# Altium PCB HV_PCB.PcbDoc
Units mil, origin at the board's own origin, x right, y up, seen from the top; angles counter-clockwise.
Board outline 3000 x 3000 mil, 2 copper layers (Top Layer, Bottom Layer); 18 components, 10 nets, 51 pads, 16 vias.
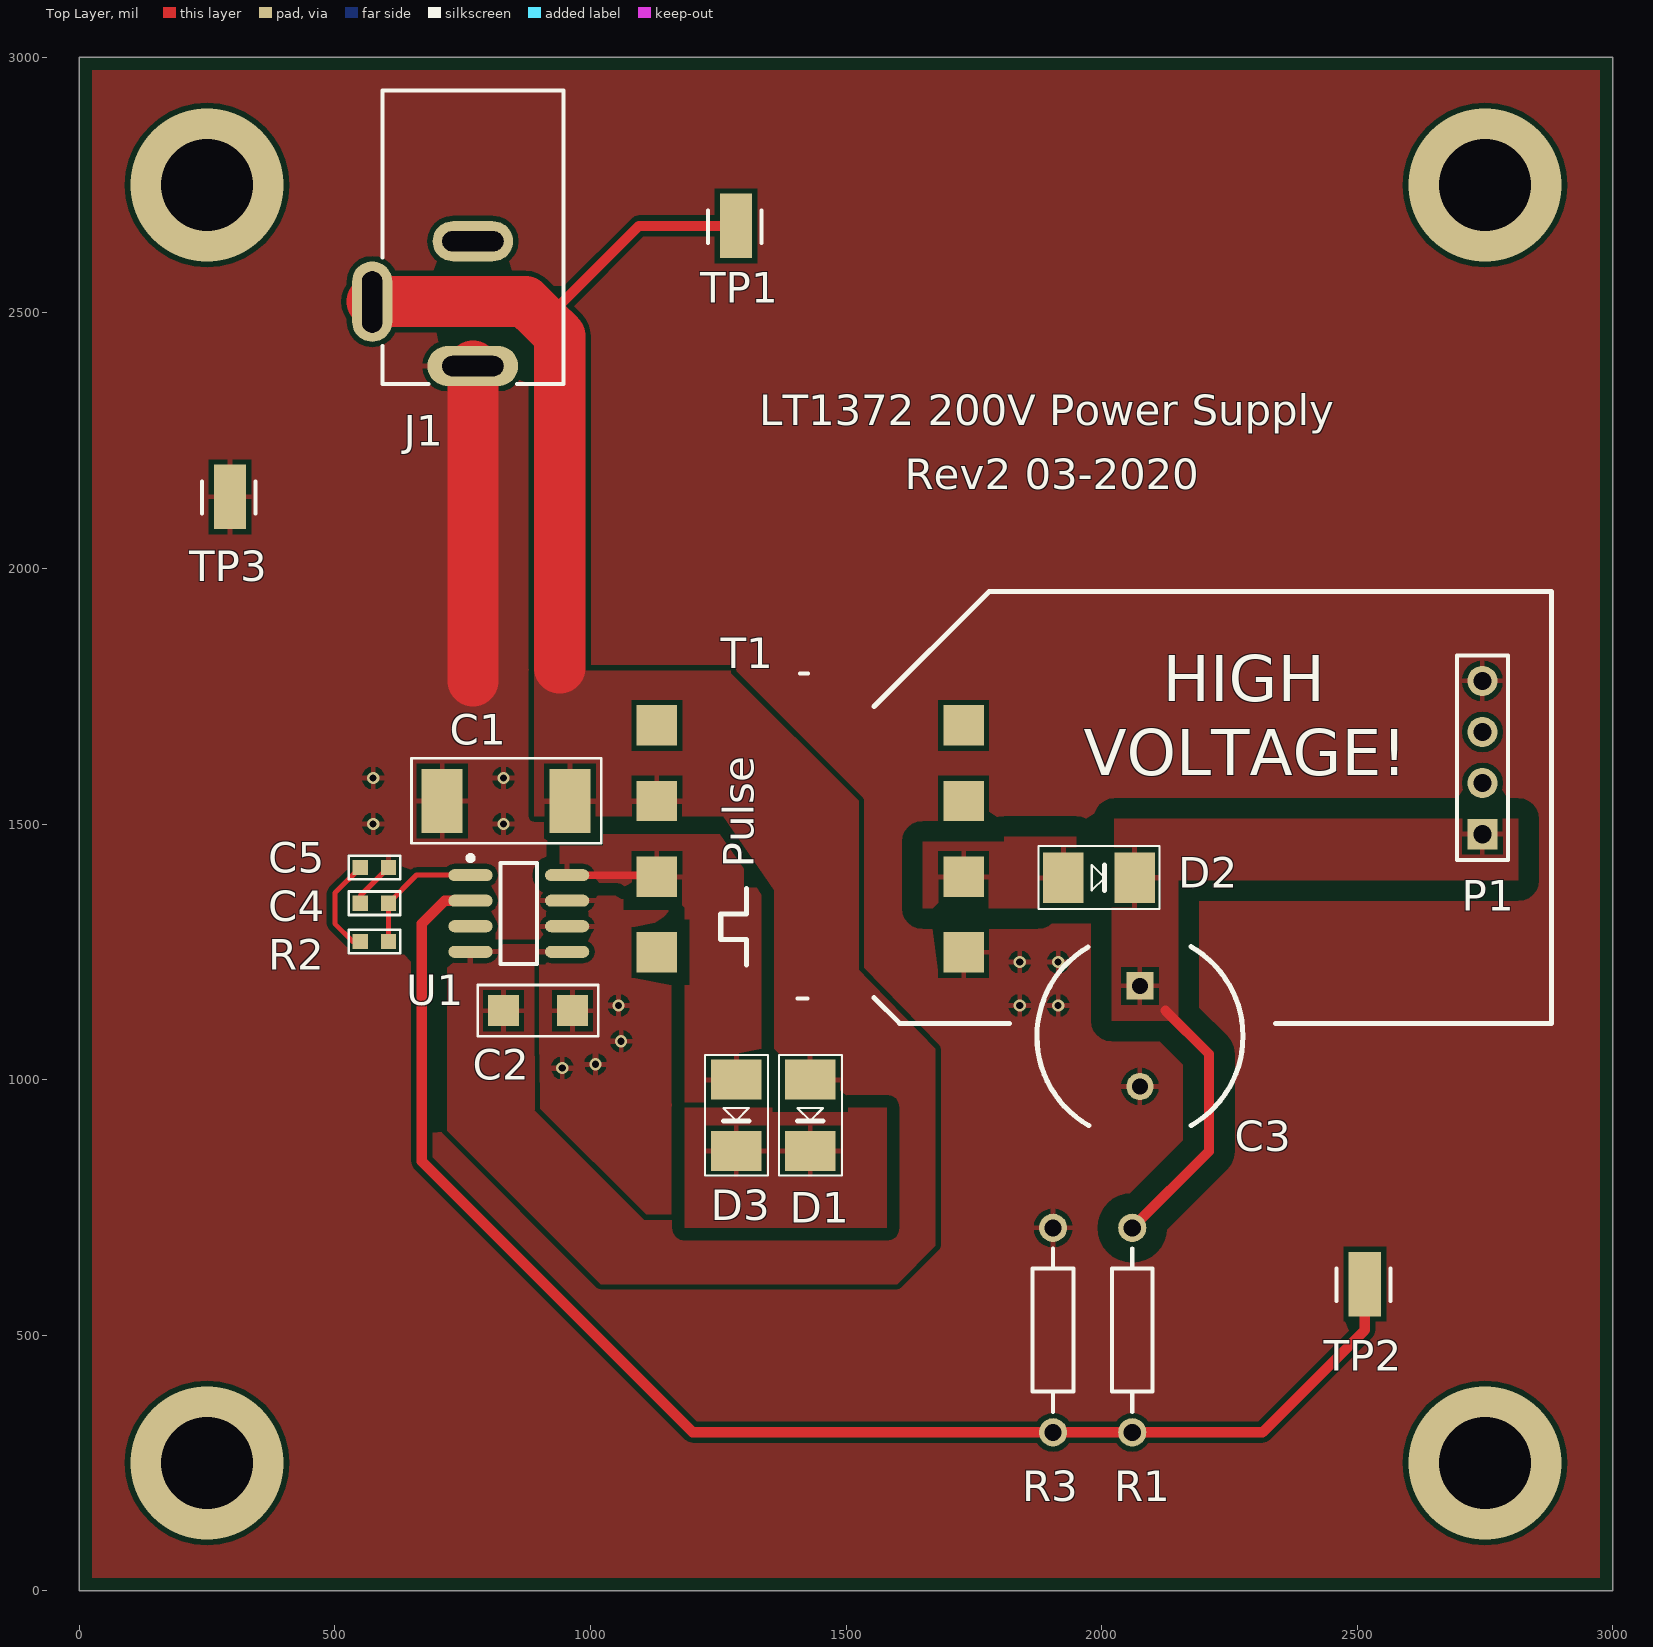
[diagram p0: Top Layer view]
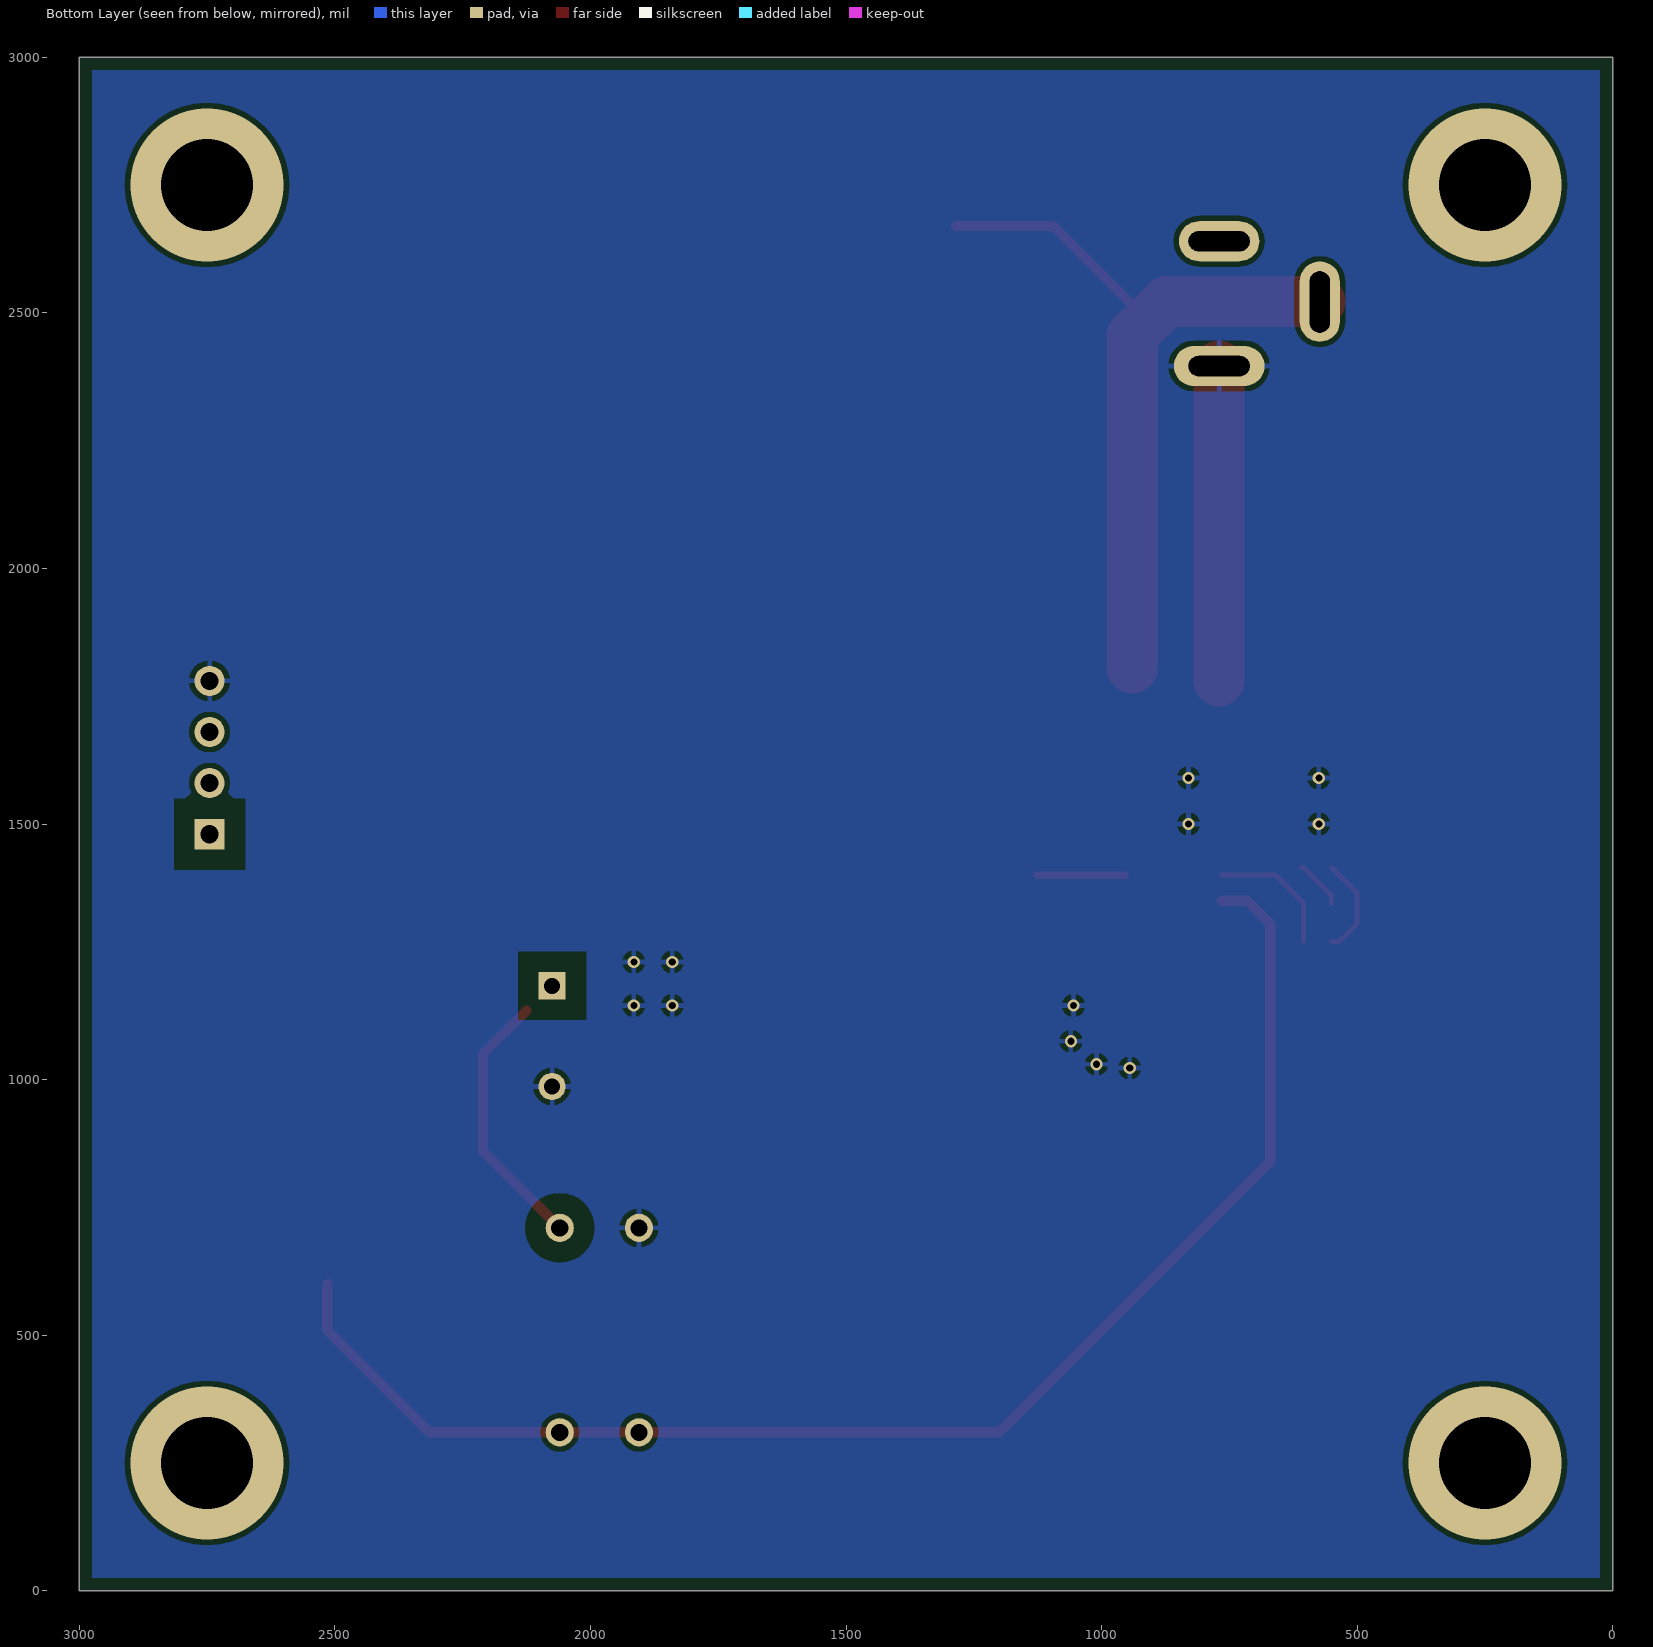
[diagram p1: Bottom Layer view, seen from below]

## Layer stack, top to bottom
Top Layer: signal copper 1.4
Dielectric: core 12.6, FR-4, Dk 4.8
Bottom Layer: signal copper 1.4

## Board outline
0,0 3000,0 3000,3000 0,3000 0,0

## Design rules (kind name [scope] priority, off if disabled: settings)
Clearance Clearance_HV [InNetClass('HV') vs Not InNetClass('HV')] p1: gap=40
Clearance Clearance_SW [InNetClass('SW') vs Not InNetClass('SW')] p2: gap=25
Clearance [All] p3: gap=10
HoleSize [All] p1: absolutevalues=TRUE maxlimit=300 minlimit=1 maxpercent=80.000 minpercent=20.000
MinimumSolderMaskSliver [All] p1: minsoldermaskwidth=7
PlaneClearance PlaneClearance_HV [InNetClass('HV')] p2: clearance=40
PlaneClearance PlaneClearance_SW [InNetClass('SW')] p3: clearance=25
PlaneConnect PlaneConnect_SW [InNetClass('SW')] p2: planeconnectstyle=Relief reliefexpansion=20 reliefentries=4 reliefconductorwidth=10 reliefairgap=25
PlaneConnect PlaneConnect_HV [InNetClass('SW')] p3: planeconnectstyle=Relief reliefexpansion=20 reliefentries=4 reliefconductorwidth=10 reliefairgap=40
PolygonConnect [All] p1: connectstyle=Relief reliefconductorwidth=10 reliefentries=4 polygonreliefangle="90 Angle"
RoomDefinition Main [InComponentClass('Main')] p1: confinementstyle=ConfineIn formatcopy=TRUE lockcomponents=FALSE outline 215,20 2865,20 2865,2975 215,2975
RoutingVias [All] p1: holewidth=28 width=50 viastyle="Through Hole" minholewidth=28 minwidth=50 maxholewidth=28 maxwidth=50
SilkscreenOverComponentPads [All] p1: minsilkscreentomaskgap=5
SolderMaskExpansion [All] p1: expansion=4
Width [All] p1: maxlimit=200 minlimit=6 preferedwidth=10 minimp=50.000000 maximp=50.000000 favimp=50.000000
25 further rules are at their usual default settings.

## Classes and differential pairs
net class SW: NetD1_K NetD3_A
net class HV: NetC3_1 NetD2_A

## Components (designator, comment, footprint, x,y, rotation, side; value= is the part's Value field where it differs from the comment)
C1 "C2512" 2512R-GENERIC 835,1545 r180 top
C2 "C1206" 1206C-GENERIC 830,1135 r0 top
C3 "4.7uF" CAP_10MM 2075,1085 r270 top
C4 "C0603" 0603C-TBD 605,1345 r180 top
C5 "C0603" 0603C-TBD 550,1415 r0 top
D1 "SML4757-E3/61" DO214AA 1430,1034.45 r90 top
D2 "UA1MTR" DO214AA 1890.79,1395 r180 top
D3 "SD560BTR" DO214AA 1285,1034.45 r90 top
J1 "PWR2.5" KLD-0202 770,2935.28 r270 top
P1 "Header 4" HDR1X4 2745,1480 r90 top
R1 "AXIAL-0.4" AXIAL-0.4 2060,510 r270 top
R2 "R0603" 0603R-TBD 605,1270 r180 top
R3 "AXIAL-0.4" AXIAL-0.4 1905,510 r90 top
T1 "PA396X_TRANS" TRANS18X15.6 1730,1249 r180 top
TP1 "Testpoint" 1206_Testpoint 1325,2595 r90 top
TP2 "Testpoint" 1206_Testpoint 2555,525 r90 top
TP3 "Testpoint" 1206_Testpoint 335,2065 r90 top
U1 "LT1372CS8" LT-S8-8_N 860,1325 r0 top

## Footprints (in the part's own frame and the unit in brackets; to place one, negate y for a bottom-side part, rotate by r counter-clockwise, add the part's x,y. Pads: shape width x height; smd on the part's side, far side on the other; paste and mask are expansions set on the pad)
0603C-TBD [mil] "CAPACITOR 0603 TBD"
  rect 30x30 smd: 1(0,0) 2(55,0)
  silkscreen extent -23,-23 78,23, body extent -4,-15 59,15, height 19
0603R-TBD [mil] "RESISTOR 0603 VALUE TO BE DETERMINED"
  rect 30x30 smd: 1(0,0) 2(55,0)
  silkscreen extent -23,-23 78,23, body extent -4,-15 59,15, height 20
1206_Testpoint [mil]
  rect 126x63 smd: 1(75,40)
  silkscreen extent 42,-10 105,95
1206C-GENERIC [mil]
  rect 60x60 smd: 1(0,0) 2(135,0)
  silkscreen extent -50,-50 185,50, body extent -8,-29 147,29, height 46
2512R-GENERIC [mil]
  rect 80x125 smd: 1(-125,0) 2(125,0)
  silkscreen extent -186,-84 185,83, body extent -139,-61 136,61, height 19
AXIAL-0.4 [mm] "Axial Device, Thru-Hole; 2 Leads; 0.4 in Pin Spacing"
  round 1.4 hole 0.85: 1(-5.08,0) 2(5.08,0)
  silkscreen extent -4.06,-1.02 4.06,1.02
CAP_10MM [mm]
  rect 1.35x1.35 hole 0.8: 1(-2.5,0)
  round 1.35 hole 0.8: 2(2.5,0)
  silkscreen extent -4.44,-5.12 4.44,5.12
DO214AA [mm]
  rect 2x2.5 smd: A(-0.875,0) K(-4.425,0)
  silkscreen extent -5.65,-1.58 0.35,1.55, body extent -5.2,-1.3 0,1.3, height 2.4
HDR1X4 [mm] "Connector; Header; 4 Position"
  rect 1.5x1.5 hole 0.9: 1(0,0)
  round 1.5 hole 0.9: 2(2.54,0) 3(5.08,0) 4(7.62,0)
  silkscreen extent -1.27,-1.27 8.89,1.27
KLD-0202 [mm] "DC Power Jack, 2.5mm, KLD Series, PCB Mount"
  oval 2x4.5 all layers, no hole: 1(13.7,0)
  round 1.5 hole 1 slot 3.048 at 90 deg: 1A(13.7,0) 2A(7.5,0)
  oval 2x4 all layers, no hole: 2(7.5,0)
  oval 4x2 all layers, no hole: 3(10.5,-5)
  round 1.5 hole 1 slot 3.048 at 0 deg: 3A(10.516,-5)
  silkscreen extent 0,-4.5 14.6,4.5
LT-S8-8_N [mm] "SOIC, 8-Leads, Body 5x4mm, Pitch 1.27mm, IPC Medium Density"
  oval 2.2x0.6 smd: 1(-2.4,1.905) 2(-2.4,0.635) 3(-2.4,-0.635) 4(-2.4,-1.905) 5(2.4,-1.905) 6(2.4,-0.635) 7(2.4,0.635) 8(2.4,1.905)
  silkscreen extent -2.52,-2.5 0.9,2.88, body extent -2,-2.5 2,2.5, height 1.76
TRANS18X15.6 [mil]
  rect 79x79 smd: 1(0,0) 2(0,-148) 3(0,-296) 4(0,-444) 5(600,-444) 6(600,-296) 7(600,-148) 8(600,0)
  silkscreen extent 304,-545 475,90, body extent 55,-535 545,80, height 39

## Part data
C1: library part 0805C-TBD
C2: library part 0805C-TBD, "CAPACITOR 0805 CERAMIC VALUE TO BE DETERMINED"
C3: library part Cap2, "Capacitor"
C4 C5: library part 0603C-TBD, "CAPACITOR 0603 CERAMIC VALUE TO BE DETERMINED"
D1: library part DIODE-ZENER-GENERIC, "GENERIC ZENER DIODE"
D2 D3: library part DIODE-GENERIC, "GENERIC DIODE"
J1: "Low Voltage Power Supply Connector"
P1: "Header, 4-Pin"
R1 R3: library part Res3, "Resistor"
R2: library part 0603R-TBD, "RESISTOR 0603 VALUE TO BE DETERMINED"
U1: "500 kHz High Efficiency 1.5 A Switching Regulator, 8-pin SOIC (S8-8), 0 to 125 degC"

## Via types
v1: diameter 24, hole 14, Top Layer to Bottom Layer, 12 vias
v2: diameter 300, hole 180, Top Layer to Bottom Layer, 4 vias

## Nets (pads, with @x,y where several pads share a name; then routed paths per layer and width w, separated by ;. In a path a pad name is that pad's centre, name@x,y a point inside that pad or via, vN(x,y) a via of type N, cw(c..) or ccw(c..) an arc to the next point about the centre after c; other vN are vias at no path point)
GND: C1.2 C2.2 C3.2 C4.2 C5.2 J1.1 J1.1A P1.4 R3.2 T1.1 TP3.1 U1.6 U1.7 | length 713.7
  Top Layer w10: C4.2 550,1360 C5.2 C5.2@610,1415
  Top Layer w100: 770,1780 J1.1
  other v1: 945,1022.64 1010,1030 1060,1075 1055,1145 1840,1145 1915,1145 1840,1230 1915,1230 575,1500 830,1500 575,1590 830,1590
NetC1_1: C1.1 C2.1 D1.A J1.3 J1.3A T1.6 TP1.1 U1.4 U1.5 | length 1496.2
  Top Layer w20: 910,2485 1095,2670 TP1.1
  Top Layer w100: J1.3 873.11,2521.89 910,2485 940,2455 940,1805
NetC3_1: C3.1 D2.K P1.1 R1.1 | length 523.9
  Top Layer w20: R1.1 2210,860 2210,1050 2125,1135 ; C3.1 C3.1@2076.57,1183.43
NetC4_1: C4.1 R2.1 U1.1 | length 258.3
  Top Layer w10: R2.1 C4.1 660,1400 U1.1
NetC5_1: C5.1 R2.2 | length 195.2
  Top Layer w10: R2.2 535,1270 500,1305 500,1365 C5.1
NetD1_K: D1.K D3.K
NetD2_A: D2.A T1.2
NetD3_A: D3.A T1.7 U1.8 | length 172.5
  Top Layer w15: U1.8 T1.7@1127,1400
NetJ1_2: J1.2 J1.2A
NetR1_2: R1.2 R3.1 TP2.1 U1.2 | length 2823.6
  Top Layer w10: U1.2@760.51,1345 U1.2
  Top Layer w20: U1.2 715,1350 670,1305 670,840 1200,310 R3.1 R1.2 2315,310 2515,510 TP2.1
pads on no net: P1.2 P1.3 T1.3 T1.4 T1.5 T1.8 U1.3
copper on no net:
  other v2: 250,250 2750,250 250,2750 2750,2750

## Polygon pours and split planes (outlines as drawn)
GND on Top Layer "GND" (solid, remove dead copper, pour order 16): 25,2975 2975,2975 2975,25 25,25 25,2975
NetD3_A on Top Layer "SW" (solid, remove dead copper, pour order 20): 940,1480 940,1345 1180,1345 1180,1330 1300,1330 1300,1480
NetD3_A on Top Layer "SW" (solid, remove dead copper, pour order 22): 1350,945 1350,1375 1185,1375 1185,945
NetC1_1 on Top Layer "GND" (solid, remove dead copper, pour order 18): 890,1800 1275,1800 1275,1795 1525,1545 1525,935 1360,935 1360,1370 1260,1515 890,1515
NetC3_1 on Top Layer "200V" (solid, remove dead copper, pour order 18): 2020,1465 2020,1115 2160,1115 2165,1110 2150,1125 2150,1395 2150,1465 2020,1465
NetD1_K on Top Layer "GND" (solid, remove dead copper, pour order 16): 1185,945 1580,945 1580,710 1185,710 1185,945
GND on Top Layer "GND" (solid, remove dead copper, pour order 22): 875,1800 875,1435 900,1435 900,1360 1050,1360 1050,1050 900,1050 900,1225 1010,1225 1010,1275 815,1275 815,1435 630,1435 630,1800
NetC1_1 on Top Layer "GND" (solid, remove dead copper, pour order 24): 890.85,1050 720,1050 720,1265 1000,1265 1000,1235 890.85,1235
NetC1_1 on Top Layer "NETC1_1" (solid, pour order 26): 720,1050 720,900 1020,600 1600,600 1675,675 1675,1060 1505,1235 1505,935 1540,935 1575,900 1575,750 1570,750 1545,725 1105,725 890,940 890.85,940.85 890.85,1050
NetD2_A on Top Layer "NETC1_1" (solid, remove dead copper, pour order 28): 1650,1475 1950,1475 1950,1335 1650,1335
GND on Top Layer "GND" (solid, remove dead copper, pour order 40): 900,1075 900,995 1050,995 1050,1075
NetC3_1 on Top Layer "GND" (solid, remove dead copper, pour order 42): 2025,1390 2815,1390 2815,1510 2025,1510 2025,1390
GND on Bottom Layer "GND" (solid, remove dead copper, pour order 38): 25,2975 2975,2975 2975,25 25,25

## Silkscreen, mask and mechanical layers (free items; w line width, h text height)
Top Overlay:
  lines w10: 1555,1160 1605,1110 ; 1555,1730 1780,1955 2475,1955 2525,1955 2880,1955 2880,1110 2340,1110 ; 1610,1110 1605,1110 ; 1820,1110 1605,1110
  text "LT1372 200V Power Supply" at 1330,2280 h60
  text "Rev2 03-2020" at 1615,2155 h60
  text "HIGH" at 2120,1740 h90
  text "VOLTAGE!" at 1965,1595 h90
Mechanical 3:
  the board outline again, w10

## Text inside footprints (layer, text, board x,y; h text height)
J1: Mechanical 1 "Mech 2 - Clearance, move to internal plane if present" at 969.44,2924.02 h11.81 r270; Mechanical 1 "Mech 1 - Slot cut-out" at 989.13,2924.02 h11.81 r270; Mechanical 1 "Assign keep-out area to slot" at 1028.5,2924.02 h11.81 r270; Mechanical 1 "Alert PCB fab to slot details" at 1008.82,2924.02 h11.81 r270
T1: Top Overlay "Pulse" at 1320,1414 h60 r90